# EAGLE board Terminierung_RS485_RJ45_Pads (EAGLE 8.5.1)

Size 13.64 x 29.45 mm. Coordinates in mm from the lower left corner, seen from the top.
Outline: 13.64,3.25 13.64,26.2 10.82,26.2 10.82,29.45 2.82,29.45 2.82,26.2 0,26.2 0,3.25 2.82,3.25 2.82,0 10.82,0 10.82,3.25 13.64,3.25
Copper layers (1*16): Top 0.035mm / dielectric 1.5mm / Bottom 0.035mm
Design rules "default": minimum track width 6mil, minimum drill 0.35mm, track to track 6mil, track to pad 6mil, pad to pad 6mil, via to via 6mil, smd to smd 6mil, copper to edge 40mil, drill to drill 6mil, minimum pad ring 10mil, minimum via ring 8mil, stop-mask expansion 4mil, vias tented up to drill 0mil, thermal gap 10mil

## Footprints (pad centres in the part's own frame; a part is rotated, then mirrored left to right if it is on the bottom)
C0805K = smd 1.3 x 1.6: 1 -1,0; 2 1,0
SOT223 = smd 1.499 x 2.007: 1 -2.261,-3.15; 2 0.025,-3.15; 3 2.311,-3.15 | smd 3.81 x 2.007: 4 0,3.15
DD-3 = smd 1.27 x 5.08: 1 -2.54,-7.938; 2 0,-7.938; 3 2.54,-7.938
SMD1,27-2,54 = smd 1.27 x 2.54: 1 0,0
R0805 = smd 1.3 x 1.5: 1 -0.95,0; 2 0.95,0

## Placement (x,y rotation side)
C1  10uF  [C0805K]  10.92,5.59 0 bottom
C2  100uF  [C0805K]  10.92,8 0 bottom
IC1  REG1117  [SOT223]  5.71,11.94 0 bottom
IC2  REG1117F  [DD-3]  5.71,15.24 0 bottom
PAD1  WIREPADSMD1,27-254  [SMD1,27-2,54]  3.47,1.39 0 top
PAD2  WIREPADSMD1,27-254  [SMD1,27-2,54]  4.34,1.39 0 bottom
PAD3  WIREPADSMD1,27-254  [SMD1,27-2,54]  5.35,1.39 0 top
PAD4  WIREPADSMD1,27-254  [SMD1,27-2,54]  6.37,1.39 0 bottom
PAD5  WIREPADSMD1,27-254  [SMD1,27-2,54]  7.33,1.39 0 top
PAD6  WIREPADSMD1,27-254  [SMD1,27-2,54]  8.35,1.39 0 bottom
PAD7  WIREPADSMD1,27-254  [SMD1,27-2,54]  9.37,1.39 0 top
PAD8  WIREPADSMD1,27-254  [SMD1,27-2,54]  10.18,1.39 0 bottom
PAD9  WIREPADSMD1,27-254  [SMD1,27-2,54]  3.45,28.05 0 top
PAD10  WIREPADSMD1,27-254  [SMD1,27-2,54]  4.32,28.05 180 bottom
PAD11  WIREPADSMD1,27-254  [SMD1,27-2,54]  5.33,28.05 180 top
PAD12  WIREPADSMD1,27-254  [SMD1,27-2,54]  6.35,28.05 180 bottom
PAD13  WIREPADSMD1,27-254  [SMD1,27-2,54]  7.37,28.05 180 top
PAD14  WIREPADSMD1,27-254  [SMD1,27-2,54]  8.38,28.05 180 bottom
PAD15  WIREPADSMD1,27-254  [SMD1,27-2,54]  9.4,28.05 180 top
PAD16  WIREPADSMD1,27-254  [SMD1,27-2,54]  10.19,28.05 180 bottom
R1  330  [R0805]  10.87,6.28 90 top
R2  150  [R0805]  6.91,6.27 270 top
R3  330  [R0805]  2.82,6.27 90 top
R4  120  [R0805]  6.96,24.17 0 top

## Library data of the parts
C1 C2 R1-R4 = resistor
IC1 = burr-brown; MPN: REG1117; OC_FARNELL: 1097566; OC_NEWARK: 14P6981
IC2 = burr-brown; MF: TEXAS INSTRUMENTS; MPN: REG1117FAKTTT; OC_FARNELL: 1296120; OC_NEWARK: 87H2562
PAD1-PAD16 = wirepad

## Nets
GND: C1.2 C2.2 IC1.1 IC2.1 PAD6.1 PAD8.1 R1.2
N$1: PAD10.1 R4.2
N$2: PAD9.1 R4.1
N$3: PAD2.1 R1.1 R2.2
N$4: PAD1.1 R2.1 R3.2
VCC: C1.1 IC1.3 IC2.3 PAD3.1 PAD7.1
VOUT: C2.1 IC1.2 IC2.2 R3.1

## Tracks (layer width: path | path; a pad name or v marks a point on that pad's centre or on a via)
GND  (6 unrouted)
N$1  (1 unrouted)
N$2  (1 unrouted)
N$3  (2 unrouted)
N$4  (2 unrouted)
VCC  (4 unrouted)
VOUT  (3 unrouted)